# Altium PCB VDMEDA_7SegDriver.PcbDoc
Units mm, origin at the board's own origin, x right, y up, seen from the top; angles counter-clockwise.
Board outline 152.4 x 101.6 mm, 2 copper layers (Top Layer, Bottom Layer); 9 components, 22 nets, 109 pads, 20 vias.
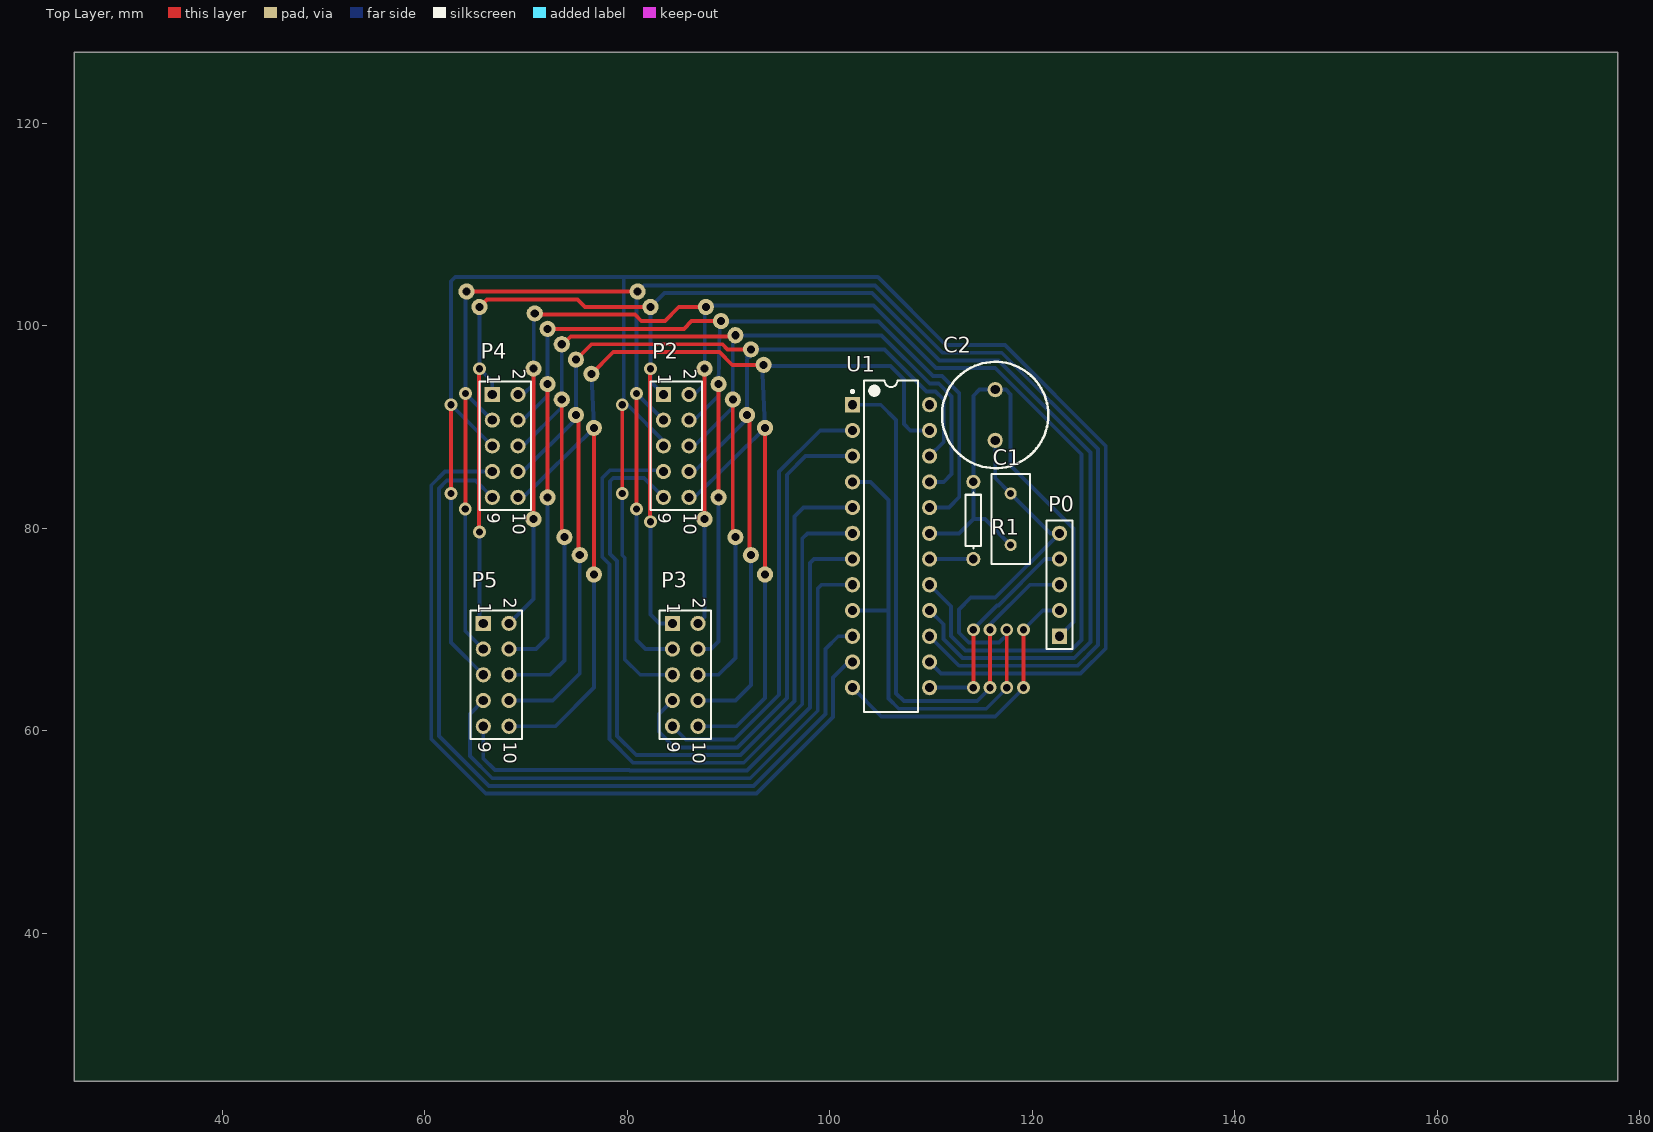
[diagram p0: Top Layer view]
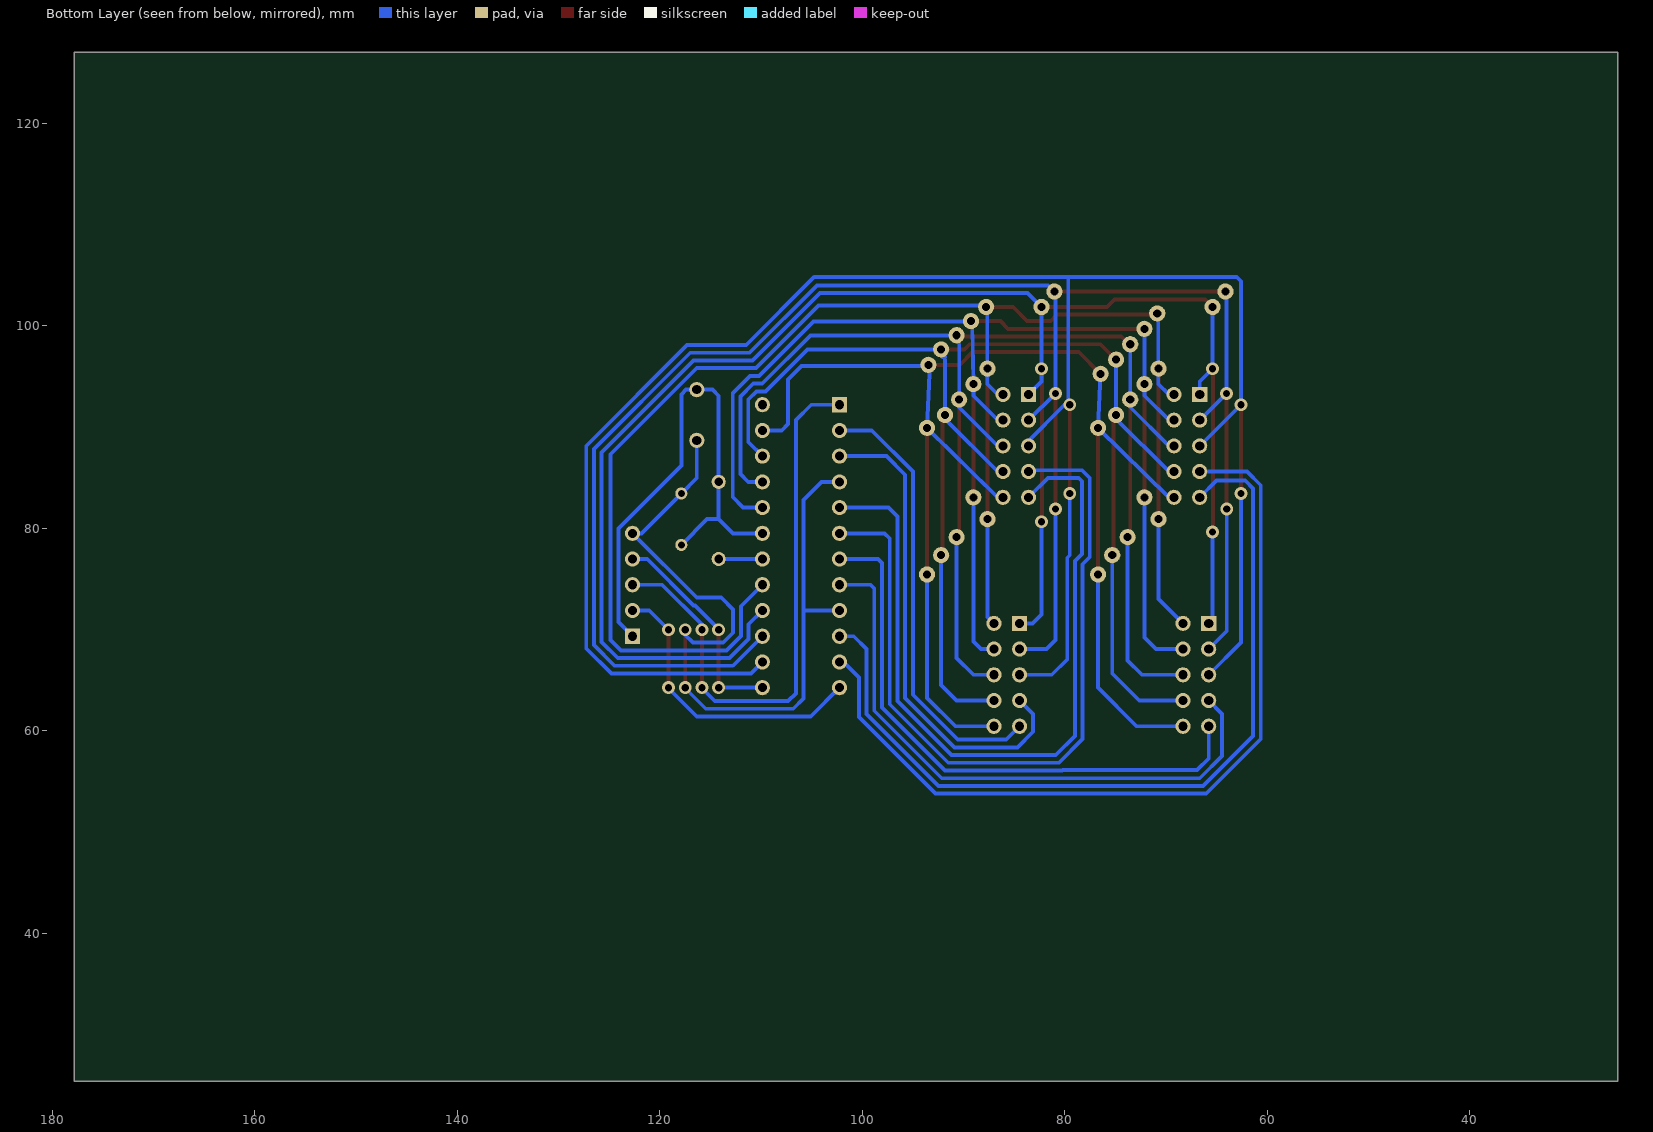
[diagram p1: Bottom Layer view, seen from below]

## Layer stack, top to bottom
Top Solder: solder mask 0.0102, Solder Resist, Dk 3.5
Top Layer: signal copper 0.0356
Dielectric 1: dielectric 0.32, FR-4, Dk 4.8
Bottom Layer: signal copper 0.0356
Bottom Solder: solder mask 0.0102, Solder Resist, Dk 3.5

## Board outline
25.4,25.4 177.8,25.4 177.8,127 25.4,127

## Design rules (kind name [scope] priority, off if disabled: settings)
Clearance [All] p1: gap=0.381
PolygonConnect [All] p1: connectstyle=Relief reliefconductorwidth=0.254 reliefentries=4 polygonreliefangle="90 Angle" airgapwidth=0.254
RoomDefinition VDMEDA_Display1_v2 [InComponentClass('VDMEDA_Display1_v2')] p1: confinementstyle=ConfineIn formatcopy=TRUE lockcomponents=FALSE outline 59.944,52.832 128.397,52.832 128.397,105.791 59.944,105.791
RoutingVias [All] p1: holewidth=0.8 width=1.6 viastyle="Through Hole" minholewidth=0.8 minwidth=1.6 maxholewidth=0.8 maxwidth=1.6
SolderMaskExpansion [All] p1: expansion=0.102
UnpouredPolygon [All] p1: allowunpoured=FALSE
Width [All] p1: maxlimit=0.381 minlimit=0.381 preferedwidth=0.381
29 further rules are at their usual default settings.

## Components (designator, comment, footprint, x,y, rotation, side; value= is the part's Value field where it differs from the comment)
C1 "Cap" RAD-0.2 117.856,80.899 r270 top
C2 "Cap Pol1" RB5-10.5 116.332,91.186 r270 top
P0 "Header 5" HDR1X5 122.682,69.342 r90 top
P2 "Header 5X2" HDR2X5 83.566,93.218 r270 top
P3 "Header 5X2" HDR2X5 84.455,70.612 r270 top
P4 "Header 5X2" HDR2X5 66.675,93.218 r270 top
P5 "Header 5X2" HDR2X5 65.786,70.612 r270 top
R1 "Res1" AXIAL-0.3 114.173,80.772 r90 top
U1 "MAX7219CNG" NG24A 106.045,78.232 r0 top

## Footprints (in the part's own frame and the unit in brackets; to place one, negate y for a bottom-side part, rotate by r counter-clockwise, add the part's x,y. Pads: shape width x height; smd on the part's side, far side on the other; paste and mask are expansions set on the pad)
AXIAL-0.3 [mm] "Axial Device, Thru-Hole; 2 Leads; 0.3 in Pin Spacing"
  round 1.4 hole 0.85: 1(-3.81,0) 2(3.81,0)
  silkscreen extent -2.77,-0.76 2.77,0.76
HDR1X5 [mm] "Connector; Header; 5 Position"
  rect 1.5x1.5 hole 0.9: 1(0,0)
  round 1.5 hole 0.9: 2(2.54,0) 3(5.08,0) 4(7.62,0) 5(10.16,0)
  silkscreen extent -1.27,-1.27 11.43,1.27
HDR2X5 [mm] "Connector; Header; 5x2 Position"
  rect 1.5x1.5 hole 0.9: 1(0,0)
  round 1.5 hole 0.9: 2(0,2.54) 3(2.54,0) 4(2.54,2.54) 5(5.08,0) 6(5.08,2.54) 7(7.62,0) 8(7.62,2.54) 9(10.16,0) 10(10.16,2.54)
  silkscreen extent -1.27,-1.27 11.43,3.81
NG24A [mm] "DIP, 24-Leads, Row Spacing 7.62mm, Pitch 2.54mm, Body 30.55x6.99mm"
  rect 1.5x1.5 hole 0.9: 1(-3.81,13.97)
  round 1.5 hole 0.9: 2(-3.81,11.43) 3(-3.81,8.89) 4(-3.81,6.35) 5(-3.81,3.81) 6(-3.81,1.27) 7(-3.81,-1.27) 8(-3.81,-3.81) 9(-3.81,-6.35) 10(-3.81,-8.89) 11(-3.81,-11.43) 12(-3.81,-13.97) 13(3.81,-13.97) 14(3.81,-11.43) 15(3.81,-8.89) 16(3.81,-6.35) 17(3.81,-3.81) 18(3.81,-1.27) 19(3.81,1.27) 20(3.81,3.81) 21(3.81,6.35) 22(3.81,8.89) 23(3.81,11.43) 24(3.81,13.97)
  silkscreen extent -3.93,-16.35 2.65,16.35, body extent -3.6,-16.32 3.6,16.32, height 5.08
RAD-0.2 [mm] "Radial Cap, Thru-Hole; 2 Leads; 0.2 in Pin Spacing"
  round 1.2 hole 0.7: 1(-2.54,0) 2(2.54,0)
  silkscreen extent -4.44,-1.91 4.44,1.91
RB5-10.5 [mm] "Capacitor (Radial); 2 Leads"
  round 1.5 hole 0.9: 1(-2.5,0) 2(2.5,0)
  silkscreen extent -5.25,-5.25 5.25,5.25

## Part data
C1: "Capacitor"
C2: "Polarized Capacitor (Radial)"
P0: "Header, 5-Pin"
P2 P3 P4 P5: "Header, 5-Pin, Dual row"
R1: "Resistor"
U1: "Serially Interfaced, 8-Digit LED Display Driver"

## Free pads (board coordinates)
  round 1.6 hole 0.8: 0(64.135,103.378) 0(65.405,101.854) 0(70.739,80.899) 0(70.739,95.758) 0(70.866,101.219) 0(72.136,83.058) 0(72.136,94.234) 0(72.136,99.695) 0(73.533,92.71) 0(73.533,98.171) 0(73.787,79.121) 0(74.93,91.186) 0(74.93,96.647) 0(75.311,77.343) 0(76.454,95.25) 0(76.708,75.438) 0(76.708,89.916) 0(81.026,103.378) 0(82.296,101.854) 0(87.63,80.899) 0(87.63,95.758) 0(87.757,101.854) 0(89.027,83.058) 0(89.027,94.234) 0(89.259,100.457) 0(90.424,92.71) 0(90.678,79.121) 0(90.678,99.06) 0(91.821,91.186) 0(92.202,77.343) 0(92.202,97.663) 0(93.472,96.139) 0(93.599,75.438) 0(93.599,89.916)

## Via types
v1: diameter 1.27, hole 0.711, Top Layer to Bottom Layer, 20 vias

## Nets (pads, with @x,y where several pads share a name; then routed paths per layer and width w, separated by ;. In a path a pad name is that pad's centre, name@x,y a point inside that pad or via, vN(x,y) a via of type N, cw(c..) or ccw(c..) an arc to the next point about the centre after c; other vN are vias at no path point)
5V: C1.2 C2.1 P0.1 R1.2 U1.19 | length 53
  Bottom Layer w0.381: U1.19 112.776,79.502 114.173,80.899 ; C1.2 115.316,80.899 114.173,80.899 ; P0.1 124.079,70.739 124.079,79.974 117.856,86.197 117.856,93.218 117.388,93.686 C2.1 114.768,93.686 114.173,93.091 R1.2 114.173,80.899
GND: C1.1 C2.2 P0.5 U1.4 U1.9 | length 79.9
  Top Layer w0.381: v1(117.475,64.262) v1(117.475,69.977)
  Bottom Layer w0.381: U1.9 105.791,71.882 ; U1.4 104.013,84.582 105.791,82.804 105.791,71.882 ; C2.2 116.332,84.963 C1.1 121.793,79.502 P0.5 116.332,73.152 113.919,73.152 112.743,71.976 112.743,69.69 113.727,68.707 116.713,68.707 117.475,69.469 v1(117.475,69.977) ; v1@117.348,64.207 v1@117.348,64.262 ; v1(117.475,64.262) 117.475,64.207 115.447,62.178 106.807,62.178 105.791,63.194 105.791,71.882
NetP0_2: P0.2 U1.12 | length 29.4
  Top Layer w0.381: v1(119.126,64.262) v1(119.126,69.977)
  Bottom Layer w0.381: U1.12 105.081,61.416 116.336,61.416 119.126,64.207 v1(119.126,64.262) ; v1@118.999,64.207 v1@118.999,64.262 ; v1(119.126,69.977) 121.031,71.882 P0.2
NetP0_3: P0.3 U1.1 | length 56.9
  Top Layer w0.381: v1(115.824,64.262) v1(115.824,69.977)
  Bottom Layer w0.381: U1.1 105.029,92.202 106.553,90.678 106.553,63.702 107.315,62.94 114.558,62.94 115.824,64.207 v1(115.824,64.262) ; v1@115.697,64.207 v1@115.697,64.262 ; v1(115.824,69.977) 115.824,70.489 119.757,74.422 P0.3
NetP0_4: P0.4 U1.13 | length 21.5
  Top Layer w0.381: v1(114.173,64.262) v1(114.173,69.977)
  Bottom Layer w0.381: U1.13 v1(114.173,64.262) ; v1(114.173,69.977) 114.173,70.039 116.524,72.39 116.648,72.39 121.22,76.962 P0.4
NetP2_1: P2.1 P3.1 P4.1 P5.1 pad.0@65.405,101.854 pad.0@82.296,101.854 U1.16 | length 176.9
  Top Layer w0.381: v1(65.405,79.629) 65.353,79.681 65.353,95.706 v1(65.405,95.758) ; pad.0@65.405,101.854 66.142,102.591 75.082,102.591 75.819,101.854 pad.0@82.296,101.854 ; v1@82.244,80.899 82.244,95.706 v1(82.296,95.758)
  Bottom Layer w0.381: v1(65.405,79.629) 65.405,70.993 P5.1 ; pad.0@65.405,101.854 v1(65.405,95.758) 66.675,94.488 P4.1 ; v1@82.296,80.899 v1(82.296,80.645) 82.296,71.501 83.185,70.612 P3.1 ; P2.1 82.296,94.488 v1(82.296,95.758) 82.296,101.854 83.668,103.226 104.162,103.226 110.816,96.572 116.658,96.572 125.73,87.499 125.73,68.772 124.141,67.183 113.092,67.183 111.219,69.055 111.219,70.518 U1.16 ; P2.1@83.82,93.472 P2.1@84.074,93.218
NetP2_2: P2.2 P3.2 P4.2 P5.2 pad.0@70.739,80.899 pad.0@70.739,95.758 pad.0@70.866,101.219 pad.0@87.63,80.899 pad.0@87.63,95.758 pad.0@87.757,101.854 U1.17 | length 169.3
  Top Layer w0.381: pad.0@70.739,80.391 70.739,80.899 pad.0@70.739,95.758 ; pad.0@70.866,101.219 70.993,101.092 80.772,101.092 81.382,100.482 83.718,100.482 85.09,101.854 pad.0@87.757,101.854 ; pad.0@87.63,80.391 87.63,80.899 pad.0@87.63,95.758
  Bottom Layer w0.381: P5.2 70.739,73.025 pad.0@70.739,80.899 ; P4.2@69.723,93.218 70.764,94.259 70.764,101.117 pad.0@70.866,101.219 ; P2.2@86.614,93.218 87.655,94.259 87.655,101.117 87.757,101.6 87.757,101.854 87.757,101.981 104.329,101.981 110.5,95.81 116.342,95.81 124.841,87.311 124.841,68.961 123.825,67.945 113.411,67.945 111.981,69.375 111.981,72.296 U1.17 ; P3.2 87.63,71.247 pad.0@87.63,80.899
NetP2_3: P2.3 P3.3 P4.3 P5.3 pad.0@64.135,103.378 pad.0@81.026,103.378 U1.15 | length 189.5
  Top Layer w0.381: v1@64.008,82.271 64.033,82.296 v1(64.033,93.32) ; pad.0@64.135,103.378 pad.0@81.026,103.378 ; v1@80.924,82.067 v1(80.924,93.32)
  Bottom Layer w0.381: v1(64.008,81.915) 64.008,69.85 P5.3 ; pad.0@64.135,103.378 64.033,103.276 v1(64.033,93.32) 66.167,91.186 66.675,91.186 P4.3 ; v1(80.899,81.915) 80.899,68.961 81.788,68.072 P3.3 ; P2.3 v1(80.924,93.32) 80.924,103.276 81.026,103.378 81.636,103.988 104.477,103.988 111.131,97.334 116.973,97.334 126.492,87.815 126.492,68.457 124.456,66.421 112.776,66.421 U1.15 ; P2.3@83.82,90.932 P2.3@84.074,90.678
NetP2_4: P2.4 P3.4 P4.4 P5.4 pad.0@72.136,83.058 pad.0@72.136,94.234 pad.0@72.136,99.695 pad.0@89.027,83.058 pad.0@89.027,94.234 pad.0@89.259,100.457 U1.20 | length 135.5
  Top Layer w0.381: pad.0@72.136,82.931 72.136,83.058 pad.0@72.136,94.234 ; pad.0@72.136,99.695 85.598,99.695 86.36,100.457 pad.0@89.259,100.457 ; pad.0@89.027,82.931 89.027,83.058 pad.0@89.027,94.234
  Bottom Layer w0.381: P5.4 70.993,68.072 72.136,69.215 pad.0@72.136,83.058 ; P4.4@69.723,90.678 72.136,93.091 72.136,94.234 pad.0@72.136,99.695 ; P2.4@86.614,90.678 89.027,93.091 89.027,94.234 89.132,100.076 89.154,100.076 89.51,100.432 104.8,100.432 110.184,95.048 111.07,95.048 112.776,93.341 112.776,83.058 111.76,82.042 U1.20 ; P3.4 88.265,68.072 89.027,68.834 pad.0@89.027,83.058
NetP2_5: P2.5 P3.5 P4.5 P5.5 U1.14 | length 205.4
  Top Layer w0.381: v1@62.611,83.795 v1(62.611,92.202) ; v1@79.248,83.439 79.502,83.693 v1(79.502,92.202)
  Bottom Layer w0.381: v1(62.611,83.439) 62.611,68.707 P5.5 ; P4.5 v1(62.611,92.202) 62.611,104.394 63.017,104.8 79.654,104.8 ; v1(79.502,83.439) 79.502,77.339 79.756,77.085 79.756,67.056 81.28,65.532 P3.5 ; P2.5@84.074,88.138 79.654,92.558 79.654,104.8 ; U1.14 110.998,65.659 124.772,65.659 127.254,68.141 127.254,88.131 117.289,98.096 111.447,98.096 104.742,104.8 79.654,104.8
NetP2_6: P2.6 P3.6 P4.6 P5.6 pad.0@73.533,92.71 pad.0@73.533,98.171 pad.0@73.787,79.121 pad.0@90.424,92.71 pad.0@90.678,79.121 pad.0@90.678,99.06 U1.21 | length 137
  Top Layer w0.381: pad.0@73.533,78.994 pad.0@73.533,92.71 ; pad.0@73.533,98.171 73.66,98.171 74.422,98.933 90.551,98.933 pad.0@90.678,99.06 ; pad.0@90.424,78.994 pad.0@90.424,92.71
  Bottom Layer w0.381: P5.6 72.39,65.532 73.787,66.929 pad.0@73.787,79.121 ; P4.6@69.723,88.138 73.533,91.948 73.533,92.71 pad.0@73.533,98.171 ; P2.6@86.614,88.138 90.424,91.948 90.424,92.71 90.424,98.171 ; P3.6 89.027,65.532 90.678,67.183 pad.0@90.678,79.121 ; pad.0@90.551,98.552 91.034,99.035 105.12,99.035 109.869,94.286 110.754,94.286 112.014,93.026 112.014,85.344 111.252,84.582 U1.21
NetP2_7: P2.7 U1.6 | length 76.5
  Bottom Layer w0.381: P2.7 83.566,85.725 78.297,85.725 77.534,84.961 77.534,77.153 78.232,76.454 78.232,59.182 80.57,56.844 91.508,56.844 97.282,62.618 97.282,78.994 97.79,79.502 U1.6
NetP2_8: P2.8 P3.8 P4.8 P5.8 pad.0@74.93,91.186 pad.0@74.93,96.647 pad.0@75.311,77.343 pad.0@91.821,91.186 pad.0@92.202,77.343 pad.0@92.202,97.663 U1.22 | length 138.3
  Top Layer w0.381: pad.0@74.93,91.186 75.184,90.932 pad.0@75.184,77.597 ; pad.0@74.93,96.647 76.454,98.171 89.408,98.171 89.916,97.663 pad.0@92.202,97.663 ; pad.0@91.821,91.186 92.075,90.932 pad.0@92.075,77.597
  Bottom Layer w0.381: P5.8 72.644,62.992 75.311,65.659 pad.0@75.311,77.343 ; P4.8@69.723,85.598 74.93,90.805 74.93,91.186 pad.0@74.93,96.647 ; P2.8@86.614,85.598 91.821,90.805 91.821,91.186 91.821,96.647 ; P3.8 90.678,62.992 92.202,64.516 pad.0@92.202,77.343 ; 91.821,96.901 92.075,96.901 92.837,97.663 105.414,97.663 109.553,93.524 110.438,93.524 111.252,92.71 111.252,88.519 U1.22
NetP2_9: P2.9 U1.5 | length 76.4
  Bottom Layer w0.381: P2.9 81.661,84.963 78.613,84.963 78.295,84.645 78.295,77.468 78.994,76.77 78.994,59.498 80.885,57.606 91.192,57.606 96.52,62.934 96.52,81.153 97.409,82.042 U1.5
NetP2_10: P2.10 P3.10 P4.10 P5.10 pad.0@76.454,95.25 pad.0@76.708,75.438 pad.0@76.708,89.916 pad.0@93.472,96.139 pad.0@93.599,75.438 pad.0@93.599,89.916 U1.23 | length 140.7
  Top Layer w0.381: pad.0@76.454,95.25 78.613,97.409 89.092,97.409 90.362,96.139 pad.0@93.472,96.139 ; pad.0@76.708,75.438 pad.0@76.708,89.916 ; pad.0@93.599,75.438 pad.0@93.599,89.916
  Bottom Layer w0.381: P5.10 72.898,60.452 76.708,64.262 pad.0@76.708,75.438 ; P4.10@69.723,83.058 76.708,89.916 pad.0@76.454,95.25 ; P2.10@86.614,83.058 93.599,89.916 93.345,95.25 ; P3.10 90.805,60.452 93.599,63.246 pad.0@93.599,75.438 ; pad.0@93.345,95.504 93.853,96.012 105.987,96.012 107.315,94.684 107.315,90.297 107.95,89.662 U1.23
NetP3_7: P3.7 U1.3 | length 48.2
  Bottom Layer w0.381: P3.7 83.133,61.67 83.133,59.905 84.67,58.368 90.877,58.368 95.758,63.25 95.758,85.282 97.598,87.122 U1.3
NetP3_9: P3.9 U1.2 | length 43.9
  Bottom Layer w0.381: P3.9 85.777,59.13 90.561,59.13 94.996,63.565 94.996,85.598 99.06,89.662 U1.2
NetP4_7: P4.7 U1.11 | length 83.2
  Bottom Layer w0.381: P4.7 61.986,85.598 60.642,84.254 60.642,59.188 66.034,53.796 92.771,53.796 100.33,61.356 100.33,65.278 101.854,66.802 U1.11
NetP4_9: P4.9 U1.10 | length 83.5
  Bottom Layer w0.381: P4.9 65.024,84.709 62.175,84.709 61.404,83.939 61.404,59.503 66.349,54.558 92.455,54.558 99.568,61.672 99.568,68.072 100.838,69.342 U1.10
NetP5_7: P5.7 U1.8 | length 59.7
  Bottom Layer w0.381: P5.7 64.464,61.67 64.464,57.521 66.665,55.32 92.139,55.32 98.806,61.987 98.806,74.041 99.187,74.422 U1.8
NetP5_9: P5.9 U1.7 | length 57.1
  Bottom Layer w0.381: P5.9 65.786,57.277 66.929,56.134 80.202,56.134 80.254,56.082 91.824,56.082 98.044,62.303 98.044,76.581 98.425,76.962 U1.7
NetR1_1: R1.1 U1.18 | length 4.3
  Bottom Layer w0.381: U1.18 R1.1
pads on no net: U1.24

## Silkscreen, mask and mechanical layers (free items; w line width, h text height)
Mechanical 1:
  lines w0.254: 58.166,51.689 58.166,106.68 129.413,106.68 129.413,51.689 58.166,51.689

## Dimensions
58.358,107.696 to 129.54,108.077 on Top Overlay
130.175,106.553 to 130.302,51.816 on Top Overlay

## Text inside footprints (layer, text, board x,y; h text height)
P2: Top Overlay "2" at 85.598,95.758 h1.27 r270; Top Overlay "1" at 83.058,95.25 h1.27 r270; Top Overlay "9" at 83.058,81.534 h1.27 r270; Top Overlay "10" at 85.598,81.534 h1.27 r270
P3: Top Overlay "2" at 86.487,73.152 h1.27 r270; Top Overlay "1" at 83.947,72.644 h1.27 r270; Top Overlay "9" at 83.947,58.928 h1.27 r270; Top Overlay "10" at 86.487,58.928 h1.27 r270
P4: Top Overlay "2" at 68.707,95.758 h1.27 r270; Top Overlay "1" at 66.167,95.25 h1.27 r270; Top Overlay "9" at 66.167,81.534 h1.27 r270; Top Overlay "10" at 68.707,81.534 h1.27 r270
P5: Top Overlay "2" at 67.818,73.152 h1.27 r270; Top Overlay "1" at 65.278,72.644 h1.27 r270; Top Overlay "9" at 65.278,58.928 h1.27 r270; Top Overlay "10" at 67.818,58.928 h1.27 r270